# Altium PCB Inverter_full.PcbDoc (part 2 of 2)
Units mm, origin at the board's own origin, x right, y up, seen from the top; angles counter-clockwise.
Board outline 209.55 x 115.54 mm, 2 copper layers (Top Layer, Bottom Layer); 189 components, 97 nets, 520 pads, 122 vias.
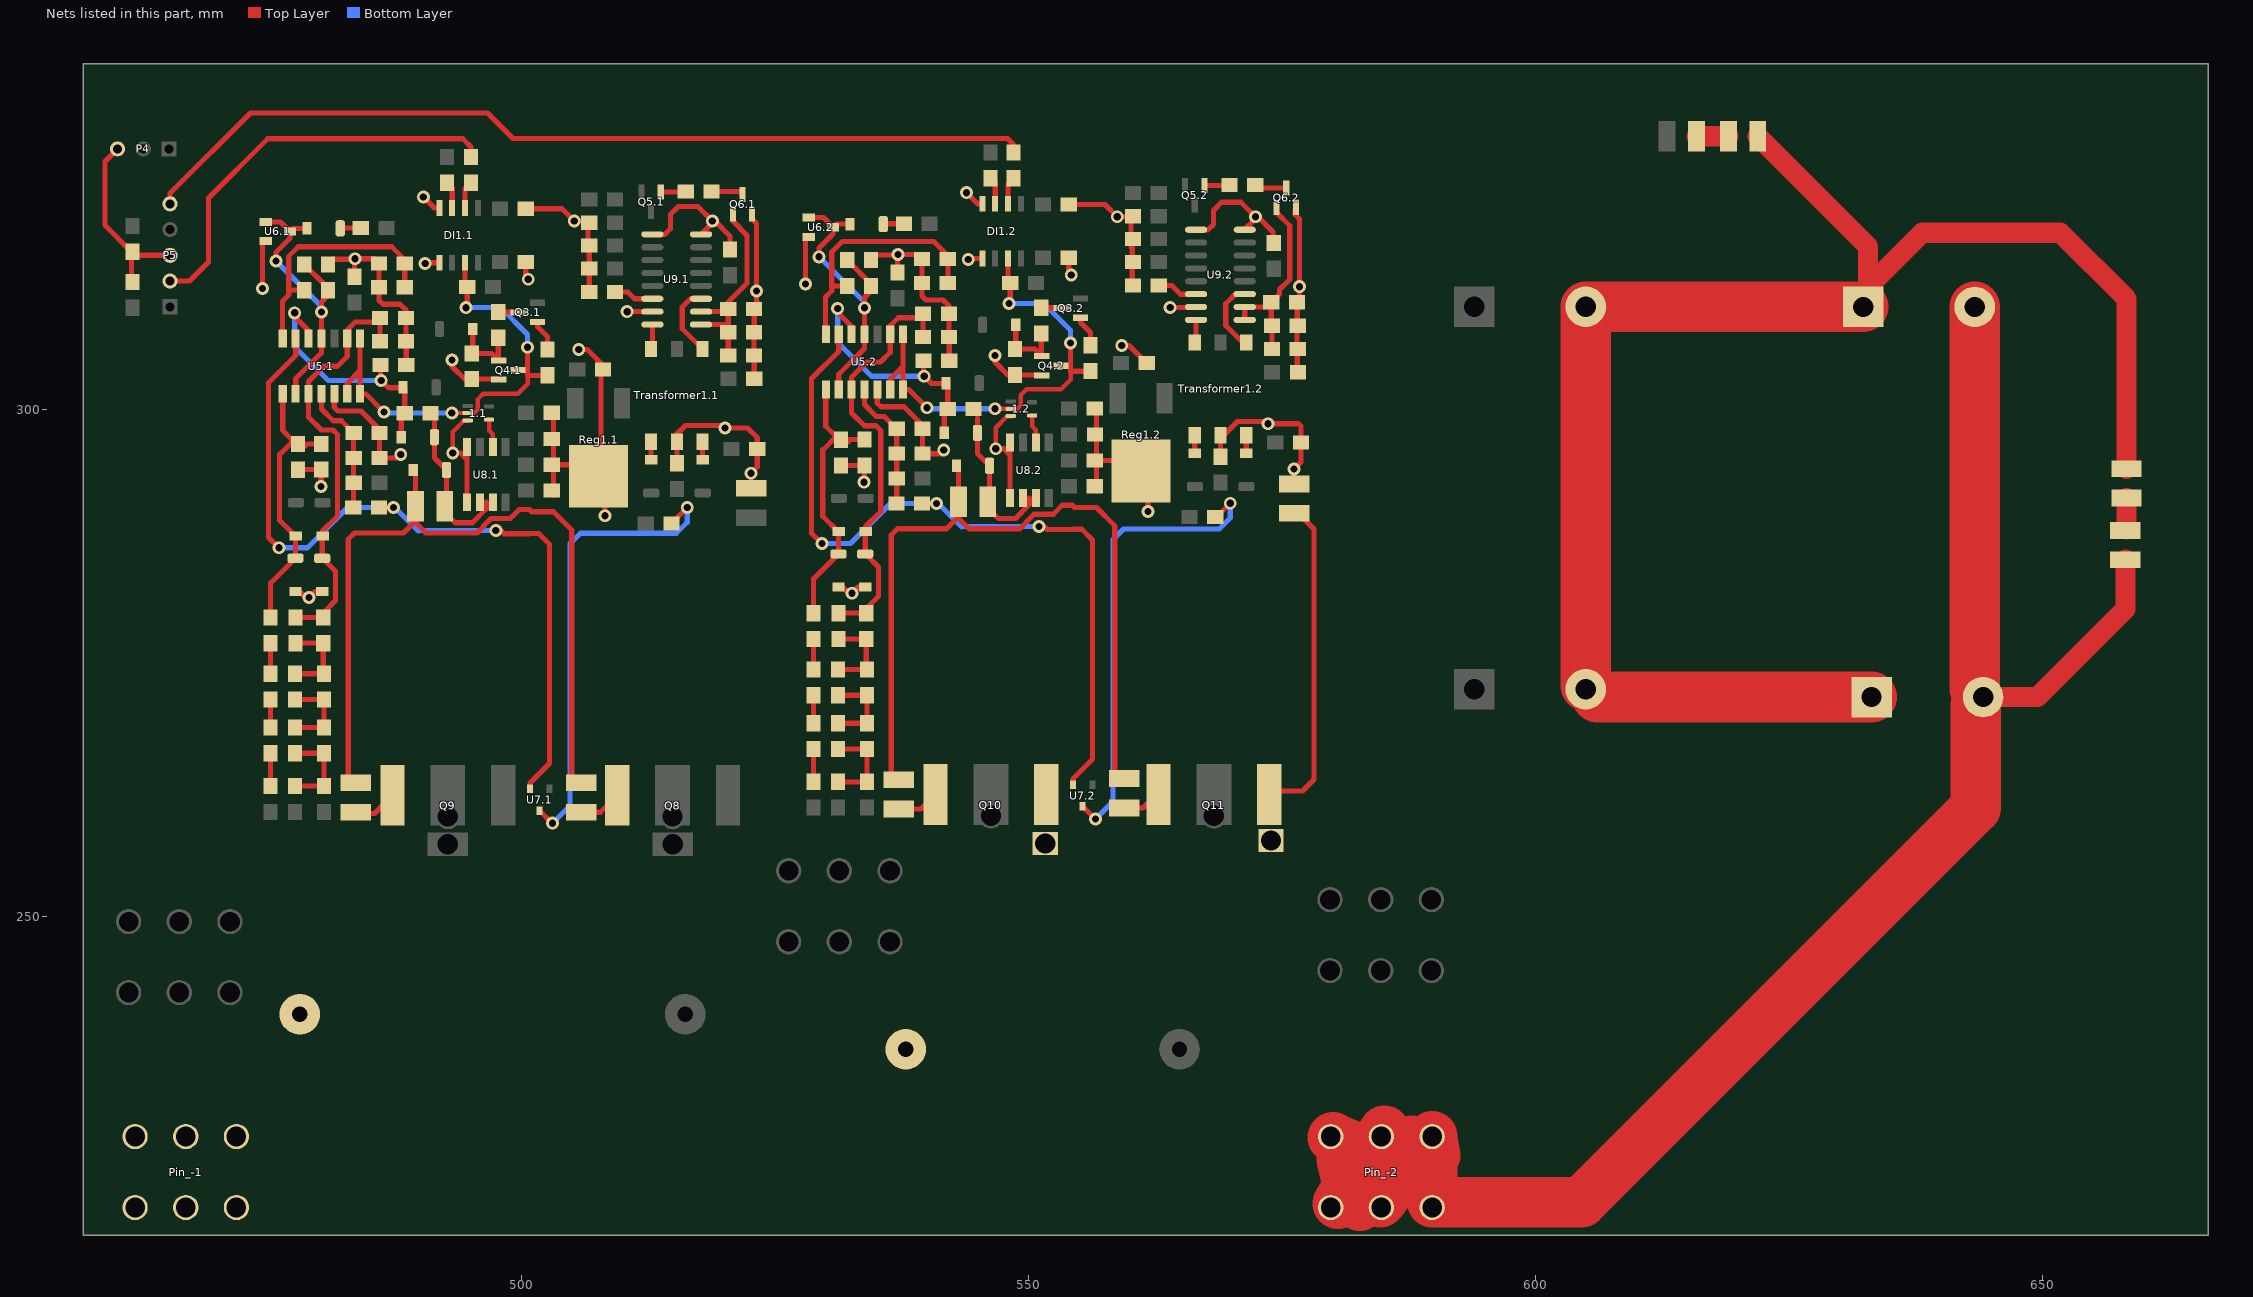
[diagram p2: the nets of this part, all layers, seen from the top]

## Via types
v1: diameter 1.27, hole 0.711, Top Layer to Bottom Layer, 122 vias

## Nets (pads, with @x,y where several pads share a name; then routed paths per layer and width w, separated by ;. In a path a pad name is that pad's centre, name@x,y a point inside that pad or via, vN(x,y) a via of type N, cw(c..) or ccw(c..) an arc to the next point about the centre after c; other vN are vias at no path point) (continued)
G1: D17.1.1 R38.1.1 R75.2 R76.2 | length 79.4
  Top Layer w0.51: R76.2@483.66,263.11 482.93,263.84 482.93,287.25 483.54,287.86 488.37,287.86 489.49,288.98 ; R38.1.1@489.013,289.957 R38.1.1@489.555,289.415 ; D17.1.1@489.355,294.07 489.558,293.867 R38.1.1@489.558,290.503 ; R38.1.1@489.425,289.045 489.49,288.98 ; R38.1.1@489.555,289.045 489.49,288.98 ; 490.58,287.89 489.49,288.98 ; 490.62,287.85 495.62,287.85 496.3,288.53 496.3,288.583 497.007,289.29 498.91,289.29 499.789,290.169 500.793,290.169 501.015,289.948 503.175,289.948 504.98,288.143 504.98,263.43 R75.2@505.4,263.01
G2: D17.2.1 R38.2.1 R79.2 R80.2 | length 79.4
  Top Layer w0.51: R79.2@537.21,263.53 536.48,264.26 536.48,287.67 537.09,288.28 541.92,288.28 543.04,289.4 ; R38.2.1@542.562,290.378 R38.2.1@543.105,289.835 ; D17.2.1@542.905,294.49 543.108,294.287 R38.2.1@543.108,290.923 ; R38.2.1@542.975,289.465 543.04,289.4 ; R38.2.1@543.105,289.465 543.04,289.4 ; 544.13,288.31 543.04,289.4 ; 544.17,288.27 549.17,288.27 549.85,288.95 549.85,289.003 550.557,289.71 552.46,289.71 553.339,290.59 554.343,290.59 554.565,290.368 556.725,290.368 558.53,288.563 558.53,263.85 R80.2@558.95,263.43
GND: C25.1.1 C25.2.1 C33.1.1 C33.2.1 C34.1.2 C34.2.2 Cin1.1.2 Cin1.2.2 Cin2.1.2 Cin2.2.2 DI1.1.4 DI1.2.4 P4.3 P5.3 Q6.1.2 Q6.2.2 R42.1.1 R42.2.1 R43.1.1 R43.2.1 R44.1.1 R44.2.1 R45.1.1 R45.2.1 R46.1.1 R46.2.1 R82.2 R83.2 U9.1.1 U9.1.7 U9.1.16 U9.2.1 U9.2.7 U9.2.16 | length 118.5
  Top Layer w0.51: P4.3@460.18,325.74 458.94,324.5 458.94,318.204 R82.2@461.561,315.583 ; R83.2@461.649,312.617 461.561,312.706 R82.2@461.561,315.583 ; P5.3@465.36,315.24 461.904,315.24 R82.2@461.561,315.583 ; v1(490.34,321) 491.434,319.906 DI1.1.4@491.914,319.906 ; C25.1.1@500.443,319.829 504.021,319.829 v1(505.22,318.63) 506.532,318.63 R42.1.1@506.705,318.457 R42.1.1@506.714,318.448 ; R46.1.1@506.578,315.602 506.578,318.076 R42.1.1@506.959,318.457 ; R43.1.1@506.705,311.633 C34.1.2@506.705,313.928 R46.1.1@506.705,316.214 ; v1(510.439,309.685) U9.1.7@512.928,309.685 ; U9.1.1@512.928,317.305 514.139,317.305 514.697,317.864 514.697,319.254 515.497,320.054 517.406,320.054 v1(518.84,318.62) ; U9.1.16@517.728,317.305 518.84,318.417 v1(518.84,318.62) ; Cin1.1.2@520.59,315.817 520.59,317.12 519.09,318.62 v1(518.84,318.62) ; Q6.1.2@522.768,319.342 522.768,318.822 523.201,318.389 v1(523.201,311.73) 523.201,310.715 523.461,310.455 C33.1.1@522.954,309.948 ; C33.1.1@522.967,309.551 522.967,307.653 522.963,307.653 R44.1.1@522.954,307.662 522.954,305.404 522.967,305.39 Cin2.1.2@522.967,303.072 Cin2.1.2@523.286,303.39 ; v1@543.62,321.69 v1(543.89,321.42) 544.984,320.326 DI1.2.4@545.464,320.326 ; C25.2.1@553.993,320.25 557.571,320.25 v1(558.77,319.05) 560.082,319.05 R42.2.1@560.264,318.868 ; 560.128,316.023 560.128,318.497 R42.2.1@560.509,318.878 ; R43.2.1@560.255,312.053 560.255,314.568 R46.2.1@560.255,316.635 ; v1(563.989,310.105) U9.2.7@566.478,310.105 ; U9.2.1@566.478,317.725 567.689,317.725 568.247,318.284 568.247,319.674 569.047,320.474 570.956,320.474 v1(572.39,319.04) ; U9.2.16@571.278,317.725 572.39,318.838 v1(572.39,319.04) ; Cin1.2.2@574.14,316.237 574.14,317.54 572.64,319.04 v1(572.39,319.04) ; Q6.2.2@576.318,319.762 576.318,319.242 576.751,318.809 v1(576.751,312.15) 576.751,311.135 577.011,310.875 C33.2.1@576.504,310.369 ; C33.2.1@576.517,309.971 576.517,308.073 576.513,308.073 576.504,308.083 576.504,305.824 576.517,305.81 576.517,303.492 576.66,303.634 Cin2.2.2@576.836,303.811
GND_ISO.1: 1.1.3 C13.1.2 C14.1.2 C15.1.2 C16.1.2 C17.1.2 C18.1.2 C19.1.1 C20.1.2 C21.1.2 C22.1.2 C24.1.2 C26.1.1 C27.1.2 C29.1.2 C30.1.2 C32.1.2 C47.1.1 D10.1.1 D12.1.1 DI1.1.5 Q4.1.2 R27.1.1 R30.1.1 R34.1.2 R35.1.2 R39.1.2 Reg1.1.1 Transformer1.1.5 U5.1.12 U6.1.2 U7.1.3 U8.1.4 U8.1.5 | length 160.8
  Top Layer w0.43: v1(493.24,295.74) 493.24,297.82 494.36,298.94 1.1.3@494.74,298.94
  Top Layer w0.51: v1(474.48,311.98) 474.48,316.33 U6.1.2@474.79,316.64 ; D12.1.1@477.73,282.1 478.136,282.1 v1@478.898,281.338 ; C13.1.2@477.981,294.09 C13.1.2@477.981,294.103 ; C13.1.2@477.997,294.107 R27.1.1@480.279,294.107 ; v1@480.279,292.389 R27.1.1@480.279,294.107 ; R27.1.1@480.279,294.147 R27.1.1@480.279,294.107 ; D10.1.1@480.364,282.1 479.66,282.1 v1(479.06,281.5) ; C18.1.2@480.939,314.347 481.452,314.859 483.549,314.859 C24.1.2@483.549,313.127 ; U5.1.12@481.56,301.58 481.56,300.24 481.92,299.88 484.18,299.88 486.007,298.053 R35.1.2@486.007,297.711 C17.1.2@486.007,295.261 487.761,295.261 v1(488.11,295.61) ; v1(483.59,314.9) 485.523,314.9 R34.1.2@485.973,314.449 C16.1.2@485.973,312.099 485.973,310.797 486.36,310.41 488.05,310.41 488.617,309.843 R30.1.1@488.617,309.059 C14.1.2@488.617,306.759 488.647,306.729 C22.1.2@488.647,304.421 ; v1(490.52,314.42) 490.434,314.506 DI1.1.5@491.914,314.506 ; v1@493.17,305.32 v1(493.17,304.93) 493.17,304.29 494.428,303.032 C15.1.2@495.121,303.032 Q4.1.2@497.718,303.032 ; v1(493.24,295.74) 494.02,295.74 494.65,295.11 ; U8.1.5@494.65,290.9 494.65,295.11 ; U8.1.4@494.65,296.35 494.65,295.11 ; C26.1.1@500.443,314.582 500.443,313.117 v1(500.68,312.88) ; U7.1.3@501.81,260.475 503.08,259.205 v1(503.08,259.24) ; C21.1.2@503.157,294.591 C21.1.2@503.161,294.591 ; C20.1.2@503.161,291.568 C21.1.2@503.161,294.591 ; C47.1.1@503.161,299.709 C21.1.2@503.161,294.591 ; Reg1.1.1@505.509,291.441 507.869,293.8 507.869,303.673 508.039,303.844 508.318,304.122 506.5,305.94 v1(505.66,305.94) ; Reg1.1.1@505.529,294.591 C21.1.2@503.161,294.591 ; Reg1.1.1@507.621,293.45 506.42,292.249 508.26,290.409 v1(508.26,289.56) ; C30.1.2@514.557,288.591 514.537,288.61 514.6,288.61 v1(516.36,290.37) ; C27.1.2@515.341,294.726 Transformer1.1.5@515.341,296.86 Transformer1.1.5@515.341,297.61 ; 515.341,297.71 Transformer1.1.5@515.341,297.61 ; R39.1.2@522.67,292.272 522.65,292.292 v1(522.65,293.75) 523.267,294.367 C29.1.2@523.267,296.151 523.267,297.263 522.32,298.21 v1(520.1,298.21) 519.85,298.46 516.191,298.46 Transformer1.1.5@515.341,297.61 ; v1@478.898,281.338 v1(479.06,281.5) ; v1@478.898,281.338 479.05,281.186 479.06,281.196 v1(479.06,281.5)
  Bottom Layer w0.51: v1(503.08,259.24) 504.8,260.96 504.8,286.81 505.83,287.84 515.281,287.84 516.36,288.919 v1(516.36,290.37)
  other v1: 480.24,292.45
GND_ISO.2: 1.2.3 C13.2.2 C14.2.2 C15.2.2 C16.2.2 C17.2.2 C18.2.2 C19.2.1 C20.2.2 C21.2.2 C22.2.2 C24.2.2 C26.2.1 C27.2.2 C29.2.2 C30.2.2 C32.2.2 C47.2.1 D10.2.1 D12.2.1 DI1.2.5 Q4.2.2 R27.2.1 R30.2.1 R34.2.2 R35.2.2 R39.2.2 Reg1.2.1 Transformer1.2.5 U5.2.12 U6.2.2 U7.2.3 U8.2.4 U8.2.5 | length 145.5
  Top Layer w0.43: v1(546.79,296.16) 546.79,298.24 547.91,299.36 1.2.3@548.29,299.36
  Top Layer w0.51: v1(528.03,312.4) 528.03,316.75 U6.2.2@528.34,317.06 ; D12.2.1@531.28,282.52 531.686,282.52 v1@532.448,281.758 ; C13.2.2@531.531,294.51 C13.2.2@531.531,294.523 ; C13.2.2@531.547,294.527 R27.2.1@533.829,294.527 ; v1@533.829,292.81 R27.2.1@533.829,294.527 ; R27.2.1@533.829,294.567 R27.2.1@533.829,294.527 ; D10.2.1@533.914,282.52 533.21,282.52 v1(532.61,281.92) ; C18.2.2@534.489,314.767 535.002,315.28 537.099,315.28 C24.2.2@537.099,313.547 ; U5.2.12@535.11,302 535.11,300.66 535.47,300.3 537.73,300.3 539.557,298.473 R35.2.2@539.557,298.131 C17.2.2@539.557,295.681 541.311,295.681 v1(541.66,296.03) ; v1(537.14,315.32) 539.073,315.32 R34.2.2@539.523,314.87 C16.2.2@539.523,312.52 539.523,311.217 539.91,310.83 541.6,310.83 542.167,310.263 R30.2.1@542.167,309.48 C14.2.2@542.167,307.18 542.197,307.15 C22.2.2@542.197,304.841 ; v1(544.07,314.84) 543.984,314.926 DI1.2.5@545.464,314.926 ; v1@546.72,305.74 v1(546.72,305.35) 546.72,304.71 547.978,303.452 C15.2.2@548.671,303.452 Q4.2.2@551.268,303.452 ; v1(546.79,296.16) 547.57,296.16 548.2,295.53 ; U8.2.5@548.2,291.32 548.2,295.53 ; U8.2.4@548.2,296.77 548.2,295.53 ; C26.2.1@553.993,315.003 553.993,313.537 v1(554.23,313.3) ; U7.2.3@555.36,260.895 556.63,259.625 v1(556.63,259.66) ; C21.2.2@556.707,295.011 C21.2.2@556.711,295.011 ; C20.2.2@556.711,291.988 C21.2.2@556.711,295.011 ; C47.2.1@556.711,300.129 C21.2.2@556.711,295.011 ; Reg1.2.1@559.079,295.011 C21.2.2@556.711,295.011 ; v1(559.21,306.36) 559.933,306.36 C32.2.2@561.682,304.611 ; Reg1.2.1@561.12,293.962 561.81,293.272 v1(561.81,289.98) ; C30.2.2@568.107,289.011 568.087,289.03 568.15,289.03 v1(569.91,290.79) ; C27.2.2@568.956,295.366 568.956,297.17 570.641,298.855 573.425,298.855 v1(573.65,298.63) 576.636,298.63 576.882,298.384 C29.2.2@576.882,296.791 576.882,294.852 v1(576.2,294.17) 576.2,292.713 R39.2.2@576.22,292.693 ; v1@532.448,281.758 532.6,281.606 532.61,281.616 v1(532.61,281.92) ; v1@532.448,281.758 v1(532.61,281.92)
  Bottom Layer w0.51: v1(556.63,259.66) 558.35,261.38 558.35,287.23 559.38,288.26 568.831,288.26 569.91,289.34 v1(569.91,290.79)
  other v1: 533.79,292.87
I_FB.1: C33.1.2 Q6.1.1 R44.1.2 R45.1.2 U9.1.9 U9.1.10 | length 20.7
  Top Layer w0.51: U9.1.9@517.728,308.415 520.299,308.415 520.414,308.53 ; U9.1.10@517.728,309.685 C33.1.2@520.15,309.685 ; R45.1.2@520.414,305.376 R44.1.2@520.414,307.662 520.414,308.53 ; Q6.1.1@520.868,319.342 520.868,318.612 522.271,317.209 522.271,312.483 520.414,310.626 C33.1.2@520.414,309.948 C33.1.2@520.15,309.685 ; C33.1.2@520.15,309.685 520.414,309.422 520.414,308.53
I_FB.2: C33.2.2 Q6.2.1 R44.2.2 R45.2.2 U9.2.9 U9.2.10 | length 19.4
  Top Layer w0.51: U9.2.9@571.34,308.875 U9.2.10@571.34,310.145 573.499,310.145 C33.2.2@573.963,310.609 ; R45.2.2@574.029,306.016 R44.2.2@574.029,308.302 573.963,308.368 C33.2.2@573.963,310.609 ; Q6.2.1@574.483,319.982 574.483,319.457 575.78,318.16 575.78,312.863 574.774,311.856 574.774,311.42 C33.2.2@573.963,310.609
Net1.1_4: 1.1.4 U8.1.2 | length 2.9
  Top Layer w0.43: 1.1.4@496.819,299.031 496.887,298.963 496.83,298.906 496.83,297.952 497.19,297.592 U8.1.2@497.19,296.35
Net1.2_4: 1.2.4 U8.2.2 | length 2.9
  Top Layer w0.43: 1.2.4@550.369,299.451 550.437,299.383 550.38,299.327 550.38,298.372 550.74,298.012 U8.2.2@550.74,296.77
NetC8.1_1: C8.1.1 C9.1.2 R19.1.2 R20.1.2 | length 8.5
  Top Layer w0.51: C9.1.2@477.69,273.983 R20.1.2@480.46,273.983 ; C8.1.1@477.719,276.993 480.3,276.993 480.461,276.833 R20.1.2@480.461,274.584 ; R20.1.2@480.461,273.983 R20.1.2@480.461,274.584 ; R20.1.2@480.54,274.504 R20.1.2@480.461,274.584
NetC8.1_2: C8.1.2 C14.1.1 D9.1.1 D10.1.2 R19.1.1 R30.1.2 U5.1.2 U5.1.10 | length 42
  Top Layer w0.51: C8.1.2@477.719,279.533 479.755,279.533 R19.1.1@479.888,279.401 ; D10.1.2@480.364,285.37 D10.1.2@480.364,285.386 ; D9.1.1@480.404,287.573 480.364,287.533 D10.1.2@480.364,285.386 ; 480.404,288.073 481.89,289.559 481.89,297.54 481.42,298.01 480.29,298.01 479.02,299.28 U5.1.10@479.02,301.58 479.02,302.8 480.52,304.3 481.87,304.3 482.83,305.26 U5.1.2@482.83,307.03 482.83,307.87 483.62,308.66 485.677,308.66 R30.1.2@486.077,309.059 C14.1.1@486.077,306.759 ; R19.1.1@480.461,279.533 480.461,279.981 481.67,281.19 481.67,284.08 D10.1.2@480.364,285.386
NetC8.2_1: C8.2.1 C9.2.2 R19.2.2 R20.2.2 | length 8.5
  Top Layer w0.51: C9.2.2@531.24,274.403 R20.2.2@534.01,274.403 ; C8.2.1@531.269,277.414 533.85,277.414 534.011,277.253 R20.2.2@534.011,275.004 ; R20.2.2@534.011,274.403 R20.2.2@534.011,275.004 ; R20.2.2@534.09,274.925 R20.2.2@534.011,275.004
NetC8.2_2: C8.2.2 C14.2.1 D9.2.1 D10.2.2 R19.2.1 R30.2.2 U5.2.2 U5.2.10 | length 42
  Top Layer w0.51: C8.2.2@531.269,279.954 533.305,279.954 R19.2.1@533.438,279.821 ; D10.2.2@533.914,285.79 D10.2.2@533.914,285.806 ; D9.2.1@533.954,287.993 533.914,287.953 D10.2.2@533.914,285.806 ; 533.954,288.493 535.44,289.979 535.44,297.96 534.97,298.43 533.84,298.43 532.57,299.7 U5.2.10@532.57,302 532.57,303.22 534.07,304.72 535.42,304.72 536.38,305.68 U5.2.2@536.38,307.45 536.38,308.29 537.17,309.08 539.227,309.08 R30.2.2@539.627,309.48 C14.2.1@539.627,307.18 ; R19.2.1@534.011,279.954 534.011,280.401 535.22,281.61 535.22,284.5 D10.2.2@533.914,285.806
NetC9.1_1: C9.1.1 C10.1.2 R20.1.1 R21.1.2 | length 8.7
  Top Layer w0.51: C10.1.2@477.69,268.4 C10.1.2@477.69,268.683 R21.1.2@480.54,268.683 480.54,271.363 480.46,271.443 C9.1.1@477.69,271.443
NetC9.2_1: C9.2.1 C10.2.2 R20.2.1 R21.2.2 | length 8.7
  Top Layer w0.51: C10.2.2@531.24,268.82 C10.2.2@531.24,269.103 R21.2.2@534.09,269.103 534.09,271.784 534.01,271.863 C9.2.1@531.24,271.863
NetC10.1_1: C10.1.1 C11.1.2 R21.1.1 R22.1.1 | length 8.9
  Top Layer w0.51: C11.1.2@477.69,262.897 R22.1.1@480.54,262.897 R21.1.1@480.54,266.143 C10.1.1@477.69,266.143
NetC10.2_1: C10.2.1 C11.2.2 R21.2.1 R22.2.1 | length 8.9
  Top Layer w0.51: C11.2.2@531.24,263.317 R22.2.1@534.09,263.317 R21.2.1@534.09,266.563 C10.2.1@531.24,266.563
NetC13.1_1: C13.1.1 D11.1.1 D12.1.2 R26.1.1 R27.1.2 U5.1.8 | length 28.2
  Top Layer w0.51: R26.1.1@475.271,279.533 475.271,282.911 D12.1.2@477.73,285.37 477.73,287.533 476.17,289.093 476.17,295.6 ; 476.17,295.64 476.17,295.6 ; U5.1.8@476.48,301.58 476.48,297.97 C13.1.1@477.51,296.94 ; 477.213,296.643 C13.1.1@477.981,296.643 C13.1.1@478.481,296.643 ; C13.1.1@477.529,296.921 C13.1.1@477.51,296.94 ; C13.1.1@477.558,296.988 C13.1.1@477.51,296.94 ; 478.701,296.423 C13.1.1@478.481,296.643 ; R27.1.2@480.279,296.647 480.276,296.643 C13.1.1@478.481,296.643 ; 476.17,295.6 C13.1.1@477.51,296.94
NetC13.2_1: C13.2.1 D11.2.1 D12.2.2 R26.2.1 R27.2.2 U5.2.8 | length 28.2
  Top Layer w0.51: R26.2.1@528.821,279.954 528.821,283.331 D12.2.2@531.28,285.79 531.28,287.953 529.72,289.513 529.72,296.02 ; 529.72,296.06 529.72,296.02 ; U5.2.8@530.03,302 530.03,298.39 C13.2.1@531.06,297.36 ; 530.763,297.063 C13.2.1@531.531,297.063 C13.2.1@532.031,297.063 ; C13.2.1@531.079,297.341 C13.2.1@531.06,297.36 ; C13.2.1@531.108,297.408 C13.2.1@531.06,297.36 ; 532.251,296.843 C13.2.1@532.031,297.063 ; R27.2.2@533.829,297.067 533.826,297.063 C13.2.1@532.031,297.063 ; 529.72,296.02 C13.2.1@531.06,297.36
NetC15.1_1: C15.1.1 D13.1.1 Q4.1.1 R29.1.2 | length 7.6
  Top Layer w0.51: D13.1.1@495.205,307.97 495.205,305.656 C15.1.1@495.121,305.572 497.078,305.572 Q4.1.1@497.731,304.919 ; R29.1.2@497.731,307.103 Q4.1.1@497.731,304.919 ; Q4.1.1@497.77,304.88 Q4.1.1@497.731,304.919
NetC15.2_1: C15.2.1 D13.2.1 Q4.2.1 R29.2.2 | length 7.6
  Top Layer w0.51: D13.2.1@548.755,308.39 548.755,306.076 C15.2.1@548.671,305.992 550.628,305.992 Q4.2.1@551.281,305.34 ; R29.2.2@551.281,307.523 Q4.2.1@551.281,305.34 ; Q4.2.1@551.32,305.3 Q4.2.1@551.281,305.34
NetC16.1_1: C16.1.1 R32.1.1 R34.1.1 U5.1.7 | length 25
  Top Layer w0.51: U5.1.7@476.499,307.049 U5.1.7@476.48,307.03 476.46,307.05 476.46,310.72 477.06,311.32 477.06,311.88 ; R32.1.1@478.599,311.807 477.133,311.807 477.06,311.88 ; C16.1.1@488.513,312.099 R34.1.1@488.513,314.449 488.513,314.797 487.22,316.09 478.01,316.09 477.06,315.14 477.06,311.88
NetC16.2_1: C16.2.1 R32.2.1 R34.2.1 U5.2.7 | length 25.1
  Top Layer w0.51: U5.2.7@530.049,307.47 U5.2.7@530.03,307.45 530.01,307.47 530.01,311.14 530.61,311.74 530.61,312.3 ; R32.2.1@532.149,312.227 530.683,312.227 530.61,312.3 ; C16.2.1@542.063,312.52 R34.2.1@542.063,314.87 542.063,315.217 540.67,316.61 531.66,316.61 530.61,315.56 530.61,312.3
NetC17.1_1: C17.1.1 R31.1.1 R33.1.1 R35.1.1 U5.1.11 | length 13
  Top Layer w0.51: U5.1.11@480.29,301.58 480.29,300.094 481.454,298.93 482.247,298.93 R35.1.1@483.467,297.711 C17.1.1@483.467,295.261 R31.1.1@483.467,292.811 483.467,290.391 R33.1.1@483.437,290.361
NetC17.2_1: C17.2.1 R31.2.1 R33.2.1 R35.2.1 U5.2.11 | length 13
  Top Layer w0.51: U5.2.11@533.84,302 533.84,300.515 535.004,299.35 535.797,299.35 R35.2.1@537.017,298.131 C17.2.1@537.017,295.681 R31.2.1@537.017,293.231 537.017,290.811 R33.2.1@536.987,290.781
NetC22.1_1: C22.1.1 D15.1.1 D16.1.1 R37.1.1 U5.1.5 | length 24.6
  Top Layer w0.51: v1(477.65,309.57) 477.65,309.17 478.36,308.46 478.38,308.46 479.02,307.82 U5.1.5@479.02,307.03 ; C22.1.1@486.107,304.421 486.107,302.963 v1(486.18,302.89) 486.893,302.177 488.507,302.177 R37.1.1@488.507,299.671 ; D15.1.1@488.164,297.308 488.164,298.838
  Bottom Layer w0.51: v1(477.65,309.57) 477.65,306.21 480.97,302.89 v1(486.18,302.89)
NetC22.2_1: C22.2.1 D15.2.1 D16.2.1 R37.2.1 U5.2.5 | length 24.6
  Top Layer w0.51: v1(531.2,309.99) 531.2,309.59 531.91,308.88 531.93,308.88 532.57,308.24 U5.2.5@532.57,307.45 ; C22.2.1@539.657,304.841 539.657,303.383 v1(539.73,303.31) 540.443,302.597 542.057,302.597 R37.2.1@542.057,300.091 ; D15.2.1@541.714,297.728 541.714,299.258
  Bottom Layer w0.51: v1(531.2,309.99) 531.2,306.63 534.52,303.31 v1(539.73,303.31)
NetC43_2: C43.2 C44.2 C45.1 C46.1 R77.2 R78.1 | length 162.8
  Top Layer w0.51: C44.2@604.97,272.82 C44.2@606.11,271.68 ; C45.1@632.31,310.17 632.81,310.67 C45.1@632.81,312.13 ; R78.1@657.73,294.77 R78.1@658.3,294.2
  Top Layer w2: R77.2@621.94,326.97 632.81,316.1 632.81,312.13 638.15,317.47 651.77,317.47 658.3,310.94 R78.1@658.3,294.2
  Top Layer w5: C44.2@604.97,272.82 C43.2@604.97,310.17 C45.1@632.31,310.17 ; C44.2@606.11,271.68 C46.1@633.16,271.68
NetD14.1_2: D14.1.2 R36.1.1 | length 2
  Top Layer w0.51: D14.1.2@482.145,317.9 482.186,317.941 R36.1.1@484.177,317.941
NetD14.2_2: D14.2.2 R36.2.1 | length 2
  Top Layer w0.51: D14.2.2@535.695,318.32 535.736,318.361 R36.2.1@537.727,318.361
NetD18.1_1: D18.1.1 Transformer1.1.6 | length 1.8
  Top Layer w0.51: Transformer1.1.6@517.881,296.86 517.881,295.081 D18.1.1@517.891,295.071
NetD18.2_1: D18.2.1 Transformer1.2.6 | length 1.8
  Top Layer w0.51: Transformer1.2.6@571.496,297.5 571.496,295.721 D18.2.1@571.506,295.711
NetD19.1_1: D19.1.1 Transformer1.1.4 | length 1.8
  Top Layer w0.51: Transformer1.1.4@512.801,296.86 512.801,295.081 D19.1.1@512.811,295.071
NetD19.2_1: D19.2.1 Transformer1.2.4 | length 1.8
  Top Layer w0.51: Transformer1.2.4@566.416,297.5 566.416,295.721 D19.2.1@566.426,295.711
NetDI1.1_2: DI1.1.2 R40.1.1 | length 2.7
  Top Layer w0.51: DI1.1.2@494.454,319.906 494.454,321.864 R40.1.1@495,322.411
NetDI1.1_3: DI1.1.3 R41.1.1 | length 2.7
  Top Layer w0.51: R41.1.1@492.714,322.411 493.184,321.941 DI1.1.3@493.184,319.906
NetDI1.2_2: DI1.2.2 R40.2.1 | length 2.7
  Top Layer w0.51: DI1.2.2@548.004,320.326 548.004,322.285 R40.2.1@548.55,322.831
NetDI1.2_3: DI1.2.3 R41.2.1 | length 2.7
  Top Layer w0.51: R41.2.1@546.264,322.831 546.734,322.361 DI1.2.3@546.734,320.326
NetQ3.1_1: Q3.1.1 R28.1.1 | length 3.1
  Top Layer w0.51: Q3.1.1@501.6,308.66 501.6,308.2 502.581,307.219 R28.1.1@502.581,305.943
NetQ3.1_3: Q3.1.3 R29.1.1 | length 2
  Top Layer w0.51: R29.1.1@497.731,309.643 Q3.1.3@499.7,309.643
NetQ3.2_1: Q3.2.1 R28.2.1 | length 3.1
  Top Layer w0.51: Q3.2.1@555.15,309.08 555.15,308.62 556.131,307.64 R28.2.1@556.131,306.363
NetQ3.2_3: Q3.2.3 R29.2.1 | length 2
  Top Layer w0.51: R29.2.1@551.281,310.063 Q3.2.3@553.25,310.063
NetQ5.1_1: Q5.1.1 R47.1.2 | length 2.6
  Top Layer w0.51: Q5.1.1@513.751,321.491 R47.1.2@516.35,321.491
NetQ5.2_1: Q5.2.1 R47.2.2 | length 2.5
  Top Layer w0.51: Q5.2.1@567.366,322.131 569.784,322.131 R47.2.2@569.836,322.183
NetQ6.1_3: Q6.1.3 R47.1.1 | length 3.2
  Top Layer w0.51: R47.1.1@518.761,321.543 521.517,321.543 Q6.1.3@521.818,321.242
NetQ6.2_3: Q6.2.3 R47.2.1 | length 3.2
  Top Layer w0.51: R47.2.1@572.376,322.183 572.676,321.882 Q6.2.3@575.433,321.882
NetQ8_1: Q8.1 R75.1 | length 4.2
  Top Layer w0.51: R75.1@505.93,260.32 507.79,260.32 Q8.1@509.46,261.99
NetQ9_1: Q9.1 R76.1 | length 4.4
  Top Layer w0.51: R76.1@483.66,260.21 485.513,260.21 Q9.1@487.292,261.989
NetQ10_1: Q10.1 R79.1 | length 4.2
  Top Layer w0.51: R79.1@537.21,260.63 539.41,260.63 Q10.1@540.85,262.07
NetQ11_1: Q11.1 R80.1 | length 4
  Top Layer w0.51: R80.1@559.48,260.74 561.3,260.74 Q11.1@562.84,262.28
NetR23.1_1: R23.1.1 R24.1.2 | length 3.2
  Top Layer w0.51: R23.1.1@475.271,262.897 R24.1.2@475.271,266.143
NetR23.2_1: R23.2.1 R24.2.2 | length 3.2
  Top Layer w0.51: R23.2.1@528.821,263.317 R24.2.2@528.821,266.563
NetR24.1_1: R24.1.1 R25.1.2 | length 2.8
  Top Layer w0.51: R24.1.1@475.271,268.683 R25.1.2@475.271,271.443
NetR24.2_1: R24.2.1 R25.2.2 | length 2.8
  Top Layer w0.51: R24.2.1@528.821,269.103 R25.2.2@528.821,271.863
NetR25.1_1: R25.1.1 R26.1.2 | length 2.6
  Top Layer w0.51: R25.1.1@475.271,273.983 R26.1.2@475.271,276.623
NetR25.2_1: R25.2.1 R26.2.2 | length 2.6
  Top Layer w0.51: R25.2.1@528.821,274.403 R26.2.2@528.821,277.043
NetR43.1_2: R43.1.2 U9.1.6 | length 4
  Top Layer w0.51: R43.1.2@509.247,311.621 510.501,311.621 511.166,310.955 U9.1.6@512.928,310.955
NetR43.2_2: R43.2.2 U9.2.6 | length 3.8
  Top Layer w0.51: R43.2.2@562.862,312.261 564.149,312.261 565,311.41 U9.2.6@566.358,311.41
NetR74_2: R74.2 R77.1 | length 3.1
  Top Layer w2: R74.2@615.89,326.97 R77.1@619.04,326.97
NetR78_2: R78.2 R81.1 | length 3.2
  Top Layer w0.51: R81.1@658.19,288.11 R81.1@658.3,288.22
  Top Layer w2: R81.1@658.3,288.22 R78.2@658.3,291.3
NetTransformer1.1_1: Transformer1.1.1 U9.1.11 | length 7
  Top Layer w0.51: U9.1.11@517.728,310.955 516.685,310.955 515.88,310.15 515.88,308.003 Transformer1.1.1@517.754,306.129
NetTransformer1.1_3: Transformer1.1.3 U9.1.8 | length 2.6
  Top Layer w0.51: Transformer1.1.3@512.674,305.873 Transformer1.1.3@512.801,306 512.928,306.127 U9.1.8@512.928,308.415
NetTransformer1.2_1: Transformer1.2.1 U9.2.11 | length 7
  Top Layer w0.51: U9.2.11@571.163,311.415 570.424,311.415 569.465,310.457 569.465,308.315 571.141,306.64 Transformer1.2.1@571.496,306.64
NetTransformer1.2_3: Transformer1.2.3 U9.2.8 | length 2.3
  Top Layer w0.51: Transformer1.2.3@566.416,306.64 566.543,306.767 U9.2.8@566.543,308.875
OK1: P5.2 R40.1.2 | length 40.5
  Top Layer w0.51: P5.2@465.36,312.7 467.28,312.7 469.15,314.57 469.15,320.9 474.99,326.74 494.22,326.74 495.029,325.931 R40.1.2@495.029,324.947
OK2: P5.5 R40.2.2 | length 89.6
  Top Layer w0.51: P5.5@465.36,320.32 465.36,321.36 473.28,329.28 496.68,329.28 499.19,326.77 547.95,326.77 548.55,326.17 R40.2.2@548.55,325.371
OK!.1: 1.1.2
OK!.2: 1.2.2
OK.1: DI1.1.7 Q4.1.3 R18.1.1 R28.1.2 U5.1.1 U5.1.13 U5.1.14 | length 46.2
  Top Layer w0.43: v1(493.15,299.69) 495.36,299.69 495.72,300.05 495.72,301.07 496.25,301.6 499.66,301.6 500.63,302.57 500.63,303.38
  Top Layer w0.51: U5.1.13@482.83,301.58 482.83,302.61 484.1,303.88 ; U5.1.1@484.1,307.03 484.1,303.88 ; v1(486.45,299.79) 486.29,299.95 484.66,301.58 U5.1.14@484.1,301.58 484.1,303.88 ; DI1.1.7@494.454,314.506 494.454,312.313 R18.1.1@494.667,312.101 494.667,310.207 v1(494.54,310.08) ; v1(500.62,306.17) 500.62,303.38 500.63,303.38 R28.1.2@502.557,303.38 ; R28.1.2@502.557,303.93 R28.1.2@502.581,303.953
  Bottom Layer w0.51: v1@486.29,299.95 v1(486.45,299.79) 486.55,299.69 v1(493.15,299.69) ; v1(494.54,310.08) 497.98,310.08 500.62,307.44 v1(500.62,306.17)
OK.2: DI1.2.7 Q4.2.3 R18.2.1 R28.2.2 U5.2.1 U5.2.13 U5.2.14 | length 46.2
  Top Layer w0.43: v1(546.7,300.11) 548.91,300.11 549.27,300.47 549.27,301.49 549.81,302.03 553.22,302.03 554.18,302.99 554.18,303.8
  Top Layer w0.51: U5.2.13@536.38,302 536.38,303.03 537.65,304.3 ; U5.2.1@537.65,307.45 537.65,304.3 ; v1(540,300.21) 539.84,300.37 538.21,302 U5.2.14@537.65,302 537.65,304.3 ; DI1.2.7@548.004,314.926 548.004,312.734 R18.2.1@548.217,312.521 548.217,310.627 v1(548.09,310.5) ; v1(554.17,306.59) 554.17,303.8 554.18,303.8 R28.2.2@556.107,303.8 ; R28.2.2@556.107,304.35 R28.2.2@556.131,304.373
  Bottom Layer w0.51: v1@539.84,300.37 v1(540,300.21) 540.1,300.11 v1(546.7,300.11) ; v1(548.09,310.5) 551.53,310.5 554.17,307.86 v1(554.17,306.59)
S2: C45.2 C46.2 Ca1.2 Ca2.2 pad.2@551.67,257.24 pad.2@573.93,257.54 Pin_-1.1 Pin_-2.1 Q10.3 Q11.3 R39.2.1 R81.2 | length 209.4
  Top Layer w0.51: Q11.3@573.93,262.41 573.931,262.409 577.029,262.409 578.18,263.56 578.18,288.26 576.648,289.793 R39.2.1@576.22,289.793 ; C46.2@643.33,272.51 C46.2@644.16,271.68 C46.2@643.42,270.94
  Top Layer w2: C46.2@644.16,271.68 649.52,271.68 658.19,280.35 R81.2@658.19,285.21
  Top Layer w5: Pin_-2.1@580.04,228.25 583.077,226.884 584.093,227.27 584.776,228.367 Pin_-2.1@585.12,228.92 ; 580.925,226.067 581.547,223.39 580.52,221.74 581.505,222.725 582.69,221.54 583.86,222.71 584.707,221.863 587.831,226.142 587.831,227.905 588.921,227.109 589.82,226.453 ; C46.2@643.33,272.51 C45.2@643.33,310.15 ; C46.2@643.42,270.94 643.42,260.73 604.55,221.86 589.82,221.86 589.82,226.453 ; 589.82,226.453 Pin_-2.1@589.82,228.34 590.108,226.498 589.82,226.453
VDRIVER.1: D15.1.2 D17.1.2 R37.1.2 R38.1.2 U8.1.6 U8.1.7 | length 15.9
  Top Layer w0.51: 491.434,298.793 D15.1.2@491.434,297.308 491.434,295.261 D17.1.2@492.625,294.07 492.625,290.67 R38.1.2@492.458,290.503 ; R38.1.2@491.998,290.963 R38.1.2@492.458,290.503 ; 496.56,290.9 496.55,290.89 496.55,290.24 495.18,288.87 493.49,288.87 492.458,289.902 R38.1.2@492.458,290.503
VDRIVER.2: D15.2.2 D17.2.2 R37.2.2 R38.2.2 U8.2.6 U8.2.7 | length 15.9
  Top Layer w0.51: 544.984,299.214 D15.2.2@544.984,297.728 544.984,295.681 D17.2.2@546.175,294.49 546.175,291.09 R38.2.2@546.008,290.923 ; R38.2.2@545.548,291.383 R38.2.2@546.008,290.923 ; 550.11,291.32 550.1,291.31 550.1,290.66 548.73,289.29 547.04,289.29 546.008,290.322 R38.2.2@546.008,290.923
VREF.1: C18.1.1 D14.1.1 R32.1.2 U5.1.4 U5.1.9 U6.1.1 U6.1.3 | length 30
  Top Layer w0.51: U6.1.1@474.79,318.54 476.24,318.54 U6.1.3@477.19,317.59 ; v1(475.81,314.67) 475.81,315.55 477.19,316.93 U6.1.3@477.19,317.59 ; U5.1.9@477.75,301.58 477.75,303.1 480.29,305.64 U5.1.4@480.29,307.03 v1(480.29,309.64) 480.29,310.65 480.939,311.299 C18.1.1@480.939,311.807 480.939,312.007 R32.1.2@478.599,314.347 ; D14.1.1@478.875,317.9 477.5,317.9 U6.1.3@477.19,317.59
  Bottom Layer w0.51: v1(475.81,314.67) 480.29,310.19 v1(480.29,309.64)
VREF.2: C18.2.1 D14.2.1 R32.2.2 U5.2.4 U5.2.9 U6.2.1 U6.2.3 | length 30
  Top Layer w0.51: U6.2.1@528.34,318.96 529.79,318.96 U6.2.3@530.74,318.01 ; v1(529.36,315.09) 529.36,315.97 530.74,317.35 U6.2.3@530.74,318.01 ; U5.2.9@531.3,302 531.3,303.52 533.84,306.06 U5.2.4@533.84,307.45 v1(533.84,310.06) 533.84,311.07 534.489,311.72 C18.2.1@534.489,312.227 534.489,312.427 R32.2.2@532.149,314.767 ; D14.2.1@532.425,318.32 531.05,318.32 U6.2.3@530.74,318.01
  Bottom Layer w0.51: v1(529.36,315.09) 533.84,310.61 v1(533.84,310.06)
VTEMP.1: R33.1.2 U5.1.6 U7.1.2 | length 78.3
  Top Layer w0.51: v1(476.1,286.4) 475.08,287.42 475.08,302.68 477.75,305.35 U5.1.6@477.75,307.03 ; R33.1.2@485.977,290.36 v1(487.39,290.36) ; v1(497.49,288.09) 498.02,288.09 498.321,287.789 500.792,287.789 500.812,287.81 501.72,287.81 502.78,286.75 502.78,265.13 500.86,263.21 U7.1.2@500.86,262.625
  Bottom Layer w0.51: v1(476.1,286.4) 478.91,286.4 482.87,290.36 v1(487.39,290.36) ; v1@487.465,290.435 489.85,288.05 489.89,288.09 v1(497.49,288.09)
VTEMP.2: R33.2.2 U5.2.6 U7.2.2 | length 78.3
  Top Layer w0.51: v1(529.65,286.82) 528.63,287.84 528.63,303.1 531.3,305.77 U5.2.6@531.3,307.45 ; R33.2.2@539.527,290.78 v1(540.94,290.78) ; v1(551.04,288.51) 551.57,288.51 551.871,288.21 554.342,288.21 554.362,288.23 555.27,288.23 556.33,287.17 556.33,265.55 554.41,263.63 U7.2.2@554.41,263.045
  Bottom Layer w0.51: v1(529.65,286.82) 532.46,286.82 536.42,290.78 v1(540.94,290.78) ; v1@541.015,290.855 543.4,288.47 543.44,288.51 v1(551.04,288.51)
pads on no net: 1.1.0 1.2.0 U8.1.3 U8.2.3

## Polygon pours and split planes (outlines as drawn)
D1 on Bottom Layer "Plus" (solid, pour order 25): 512.08,258.652 517.55,258.652 517.55,253.3 519.69,244.257 525.93,239.72 525.93,232.42 512.77,232.42 506.13,246.56 472.71,246.56 472.71,240.54 459.98,240.54 459.98,251.29 487.19,251.29 490.14,256.77 490.14,258.5 495.018,258.5 495.018,256.77 497.89,251.29 510.188,251.29 512.08,256.77
GND on Bottom Layer "GND0" (solid, pour order 39): 458.61,307.24 466.23,307.24 471.37,312.38 471.37,312.68 471.37,320.31 471.37,320.63 472.615,321.875 473.88,321.875 473.88,323.89 521.93,323.89 522.4,323.89 524.27,322.02 524.57,322.02 529.39,322.02 531.57,324.2 532.82,325.45 577.93,325.45 578.63,325.45 578.63,333.54 578.28,333.54 577.77,333.54 460.95,333.54 459.71,333.54 458.15,331.98 457.83,331.66 457.83,308.8
S2 on Bottom Layer "Minus" (solid, pour order 27): 570.7,229.59 578.03,219.98 590.93,219.98 591.36,219.55 590.93,219.98 590.93,229.59 576.01,237.49 576.01,260.69 571.92,260.69 571.92,252.65 570.22,249.23 556.51,249.23 554.325,252.65 554.325,260.06 549.84,260.06 549.84,251.79 538.1,243.26 529.29,226.72 486.54,226.72 481.52,240.04 475.79,240.04 475.79,233.1 473.56,229.583 459.14,229.59 459.14,219.55 536.46,219.55 547.655,242.56 570.94,242.56 570.94,229.59
D1 on Bottom Layer "PLUS" (solid, shelved, pour order 19): 475.53,263.04 488.62,263.04 488.62,266.26 491.375,270.33 491.375,286.74 495.462,286.74 495.462,277.74 495.462,272.41 515.59,272.41 515.59,264.072 512.91,261.392 512.91,250.63 515.59,248.34 515.59,241.984 511.32,241.984 511.32,247.29 509.96,249.89 509.96,261.82 511.68,264.072 511.68,268.5 495.882,268.5 492.685,265.302 492.685,252.84 488.06,252.84 475.2,252.84
GND on Bottom Layer "GND" (solid, pour order 14): 473.85,326.07 473.83,326.05 473.83,321.85 488.18,321.85 491.47,318.56 491.63,318.72 502.82,318.72 503.83,318.72 505.49,317.06 505.39,316.96 505.39,311.92 505.39,311.38 506.99,309.78 507.05,309.84 508.87,309.84 511.84,306.87 511.84,306.1 513.88,304.06 516.31,304.06 516.41,304.06 518.82,301.65 519.57,300.9 524.34,300.9 524.45,300.9 524.98,301.43 525.14,301.59 525.14,324.99 525.14,325.84 524.98,326 524.9,326.08 473.84,326.08
GND_ISO.1 on Bottom Layer "GND_iso1" (solid, pour order 13): 473.91,319.62 487.26,319.62 490.49,316.39 490.51,316.37 501.19,316.37 502.61,314.95 502.61,310.09 507.72,304.98 508.96,304.98 512.07,301.87 512.07,301.08 512.07,300.1 513.21,298.96 513.73,298.44 523.59,298.44 523.64,298.44 524.59,297.49 525.04,297.04 525.04,288.9 525.04,287.66 524.71,287.33 524.69,287.35 505.48,287.35 505.39,287.35 504.82,286.78 504.22,286.18 503.33,286.18 503.16,286.18 502.11,287.23 483.5,287.23 483.35,287.23 483,286.88 483.01,286.87 483.01,282.7 483.01,280.87 482.58,280.44 482.51,280.37 476.39,280.37 476.39,280.41 474.5,282.3 473.91,282.89
GND_ISO.2 on Bottom Layer "GND_iso2" (solid, pour order 12): 527.46,320.04 540.81,320.04 544.04,316.81 544.06,316.79 554.74,316.79 556.16,315.37 556.16,310.51 561.27,305.4 562.51,305.4 565.62,302.29 565.62,301.5 565.62,300.52 566.76,299.38 567.28,298.86 577.14,298.86 577.19,298.86 578.14,297.91 578.59,297.46 578.59,289.32 578.59,288.08 578.26,287.75 578.24,287.77 559.03,287.77 558.94,287.77 558.37,287.2 557.77,286.6 556.88,286.6 556.71,286.6 555.66,287.65 537.05,287.65 536.9,287.65 536.55,287.3 536.56,287.29 536.56,283.12 536.56,281.29 536.13,280.86 536.06,280.79 529.94,280.79 529.94,280.83 528.05,282.72 527.46,283.31
GND on Bottom Layer "GND2" (solid, pour order 17): 527.33,326.32 527.31,326.3 527.31,322.1 541.66,322.1 544.95,318.81 545.11,318.97 556.3,318.97 557.31,318.97 558.97,317.31 558.87,317.21 558.87,312.17 558.87,311.63 560.47,310.03 560.53,310.09 562.35,310.09 565.32,307.12 565.32,306.35 567.36,304.31 569.79,304.31 569.89,304.31 572.3,301.9 573.05,301.15 577.82,301.15 577.93,301.15 578.46,301.68 578.62,301.84 578.62,325.24 578.62,326.09 578.46,326.25 578.38,326.33 527.32,326.33
S2 on Top Layer "Plus" (solid, pour order 37): 572.04,265.285 576.15,265.261 576.15,255.15 572.04,255.15
S2 on Top Layer "Plus" (solid, pour order 35): 550.1,265.385 553.23,265.385 553.23,255.25 550.1,255.25
D1 on Top Layer "Plus" (solid, pour order 33): 512.56,264.74 512.59,264.77 517.13,264.77 517.13,255.63 512.56,255.63
D1 on Top Layer "Plus" (solid, pour order 31): 490.49,264.97 490.89,264.97 494.99,264.97 494.99,255.86 490.49,255.86
D1 on Top Layer "Plus" (solid, pour order 29): 508.05,242.3 522.16,242.3 525.59,239.97 525.59,233.015 532.05,229.18 557.98,229.18 562.31,239.97 570.042,239.97 578.1,249.3 578.68,253.66 591.41,253.66 591.41,243.07 584.33,243.07 573.375,233.015 567.405,233.015 563.76,223.4 526.27,223.4 519.98,223.4 512.96,230.42
D2 on Top Layer "Phase" (solid, pour order 23): 519.2,265.01 522.08,265.01 522.08,260.59 525.15,256.14 538.588,256.14 543.97,256.14 543.97,265.45 548.53,265.45 548.53,252.61 563.65,252.61 565.94,257.25 565.94,265.01 570.58,265.01 570.58,253.46 567.01,246.97 540.12,246.97 540.12,245.91 521.64,245.91 521.64,246.97 499.79,246.97 496.41,252.61 496.41,265.01 499.79,265.01 499.79,257.25 504.43,252.61 519.2,252.61
S2 on Top Layer "PLUS" (solid, shelved, pour order 21): 483.95,273.49 488.83,273.49 488.95,273.61 489.8,272.76 489.8,269.35 489.8,267.27 491.26,265.81 492.97,264.1 492.97,257.89 492.97,246.79 488.83,243.25 500.41,243.03 504.07,247.77 504.68,248.38 506.02,249.72 508.82,249.72 510.78,249.72 514.19,253.13 514.19,262.28 546.74,262.28 547.11,261.91 547.35,261.67 547.35,252.64 520.28,252.64 517.84,250.2 515.89,248.25 514.06,248.25 513.45,248.25 505.53,240.33 503.7,238.5 503.7,228.38 501.14,228.38 500.65,227.89 500.41,228.13 500.41,236.18 500.41,238.74 481.39,238.74 481.39,235.33 481.14,235.08 481.14,228.5 477.85,228.5 478.7,229.35 478.7,238.74 489.8,253.328 489.8,262.193 483.95,267.27
+12V on Top Layer "+12V_L01_P016" (solid, pour order 16): 514.47,310.16 516.36,312.05 516.36,313.66 516.36,314.94 516.04,315.26 515.95,315.35 515.13,315.35 514.74,315.35 514.44,315.05
+12V on Top Layer "+12V_L01_P015" (solid, pour order 15): 568.02,310.58 569.91,312.47 569.91,314.08 569.91,315.36 569.59,315.68 569.5,315.77 568.68,315.77 568.29,315.77 567.99,315.47

## Keep-outs
Keep-Out Layer:
  lines w0.1: 456.78,218.56 456.78,334.12 666.15,334.12 666.43,334.4 666.43,218.7 666.16,218.43 456.91,218.43 456.78,218.56

## Other copper
Top Layer:
  text "Inverter 1ph / March 2017 / Hildo G Jr" at 425.91,235.57 h6 r90

## Text inside footprints (layer, text, board x,y; h text height)
Q8: Top Overlay "G" at 511.02,263.59 h1.2; Top Overlay "D" at 517.12,263.59 h1.2; Top Overlay "S" at 522.12,263.59 h1.2
Q9: Top Overlay "S" at 499.952,263.59 h1.2; Top Overlay "D" at 494.952,263.59 h1.2; Top Overlay "G" at 488.852,263.59 h1.2
Q10: Top Overlay "G" at 542.41,263.67 h1.2; Top Overlay "D" at 548.51,263.67 h1.2; Top Overlay "S" at 553.51,263.67 h1.2
Q11: Top Overlay "S" at 575.5,263.67 h1.2; Top Overlay "D" at 570.5,263.67 h1.2; Top Overlay "G" at 564.4,263.67 h1.2